# EAGLE board Teensy_Stromzaehler (EAGLE 9.6.0)
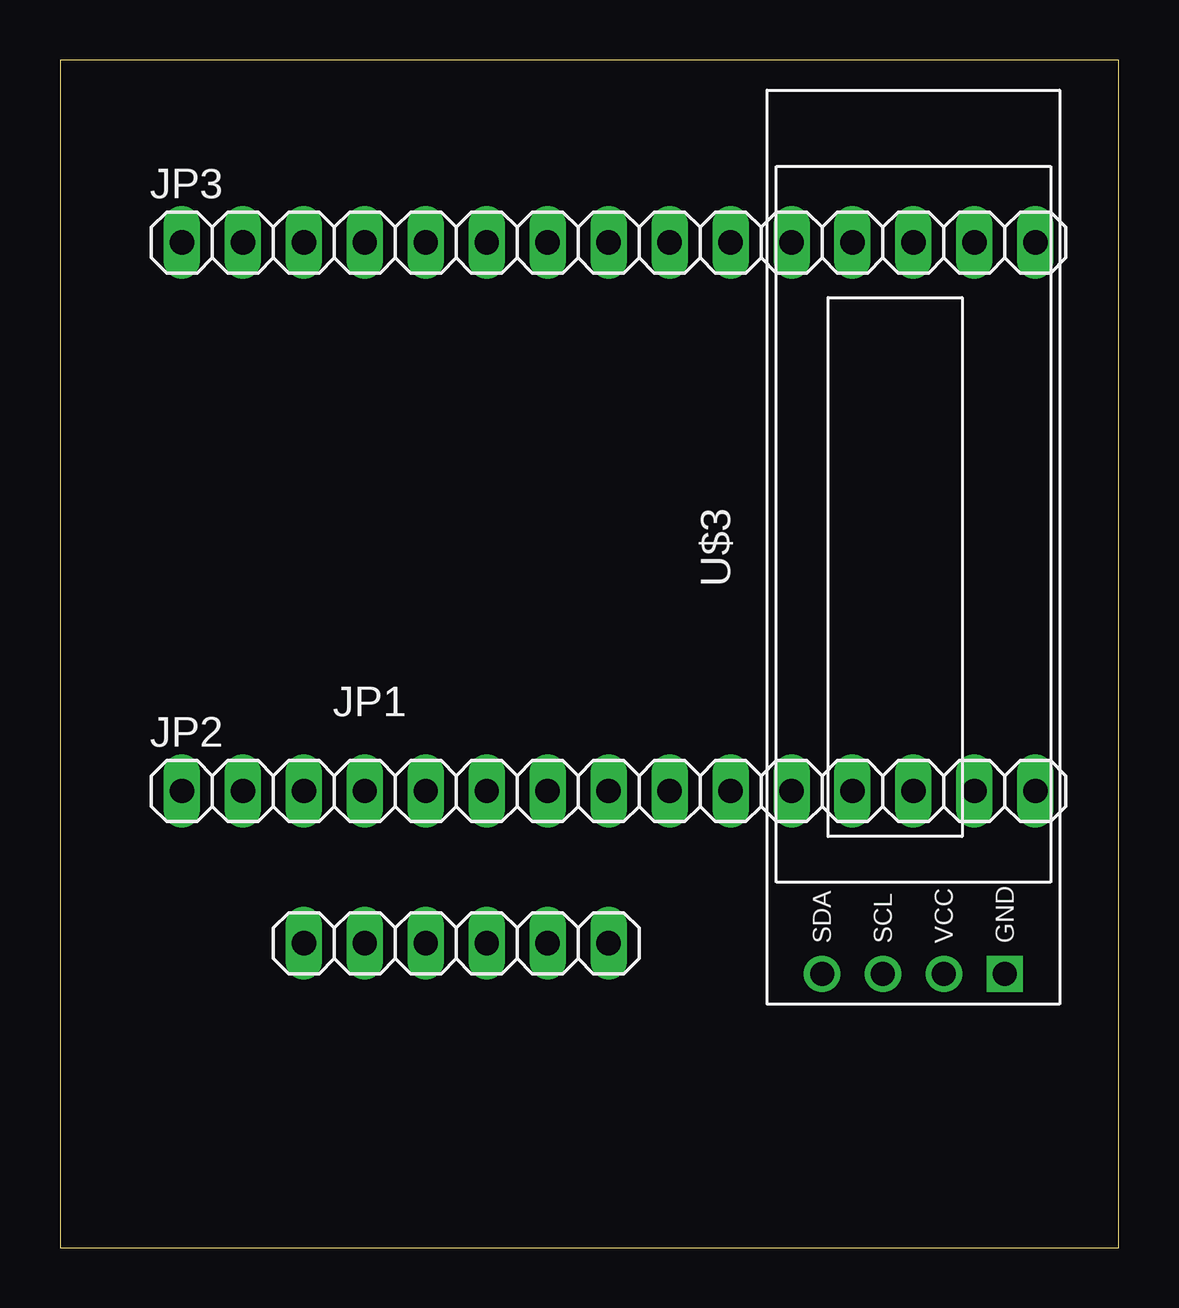
[diagram p0: board, top side]
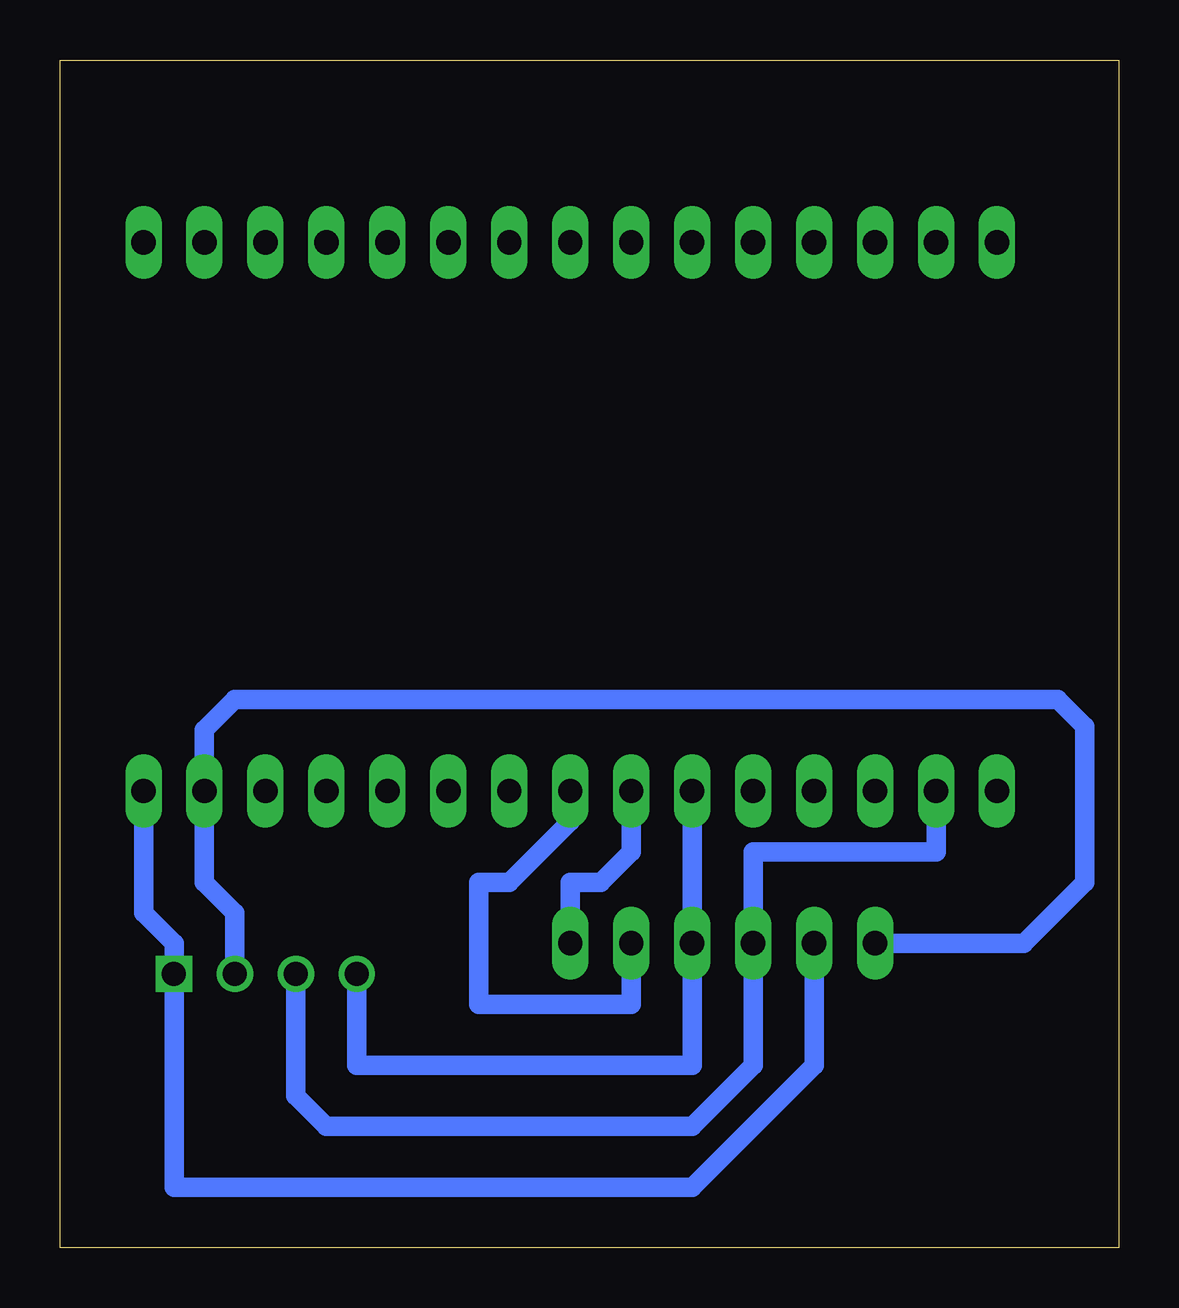
[diagram p1: board, bottom side, seen from below]

Size 44.12 x 49.52 mm. Coordinates in mm from the lower left corner, seen from the top.
Outline: 0,0 44.12,0 44.12,49.52 0,49.52 0,0
Copper layers (1*16): Top 0.035mm / dielectric 1.5mm / Bottom 0.035mm
Design rules "default": minimum track width 6mil, minimum drill 0.35mm, track to track 6mil, track to pad 6mil, pad to pad 6mil, via to via 6mil, smd to smd 6mil, copper to edge 40mil, drill to drill 6mil, minimum pad ring 10mil, minimum via ring 8mil, stop-mask expansion 4mil, vias tented up to drill 0mil, thermal gap 10mil

## Footprints (pad centres in the part's own frame; a part is rotated, then mirrored left to right if it is on the bottom)
1X06 = drill 1.016 long: 1 -6.35,0; 2 -3.81,0; 3 -1.27,0; 4 1.27,0; 5 3.81,0; 6 6.35,0
1X15 = drill 1.016 long: 1 -17.78,0; 2 -15.24,0; 3 -12.7,0; 4 -10.16,0; 5 -7.62,0; 6 -5.08,0; 7 -2.54,0; 8 0,0; 9 2.54,0; 10 5.08,0; 11 7.62,0; 12 10.16,0; 13 12.7,0; 14 15.24,0; 15 17.78,0
DISPLAY-OLED-128X32 = drill 1 square: 1 -17.78,-3.81 | drill 1: 2 -17.78,-1.27; 3 -17.78,1.27; 4 -17.78,3.81

## Placement (x,y rotation side)
JP1  [1X06]  16.51,12.7 0 top
JP2  [1X15]  22.86,19.05 0 top
JP3  [1X15]  22.86,41.91 0 top
U$3  DISPLAY-OLED-128X32  [DISPLAY-OLED-128X32]  35.56,29.21 90 top

## Library data of the parts
JP1-JP3 = pinhead
U$3 = diy-modules

## Nets
GND: JP1.2 JP2.15 U$3.1
N$5: JP1.5 JP2.8
N$6: JP1.6 JP2.7
N$14: JP1.3 JP2.2 U$3.3
N$15: JP1.4 JP2.6 U$3.4
VDD: JP1.1 JP2.14 U$3.2

## Tracks (layer width: path | path; a pad name or v marks a point on that pad's centre or on a via)
GND
  Bottom 0.813: JP1.2 12.7,7.62 17.78,2.54 39.37,2.54 U$3.1 39.37,12.7 40.64,13.97 JP2.15
N$5
  Bottom 0.813: JP1.5 20.32,10.16 26.67,10.16 26.67,15.24 25.4,15.24 22.86,17.78 JP2.8
N$6
  Bottom 0.813: JP2.7 20.32,16.51 21.59,15.24 22.86,15.24 JP1.6
N$14
  Bottom 0.813: JP2.2 7.62,16.51 15.24,16.51 JP1.3 15.24,7.62 17.78,5.08 33.02,5.08 34.29,6.35 U$3.3
N$15
  Bottom 0.813: JP2.6 JP1.4 17.78,7.62 31.75,7.62 U$3.4
VDD
  Bottom 0.813: U$3.2 36.83,13.97 38.1,15.24 JP2.14 38.1,21.59 36.83,22.86 2.54,22.86 1.42,21.74 1.42,15.24 3.96,12.7 JP1.1